# Allegro board stspin32g4_foc.brd
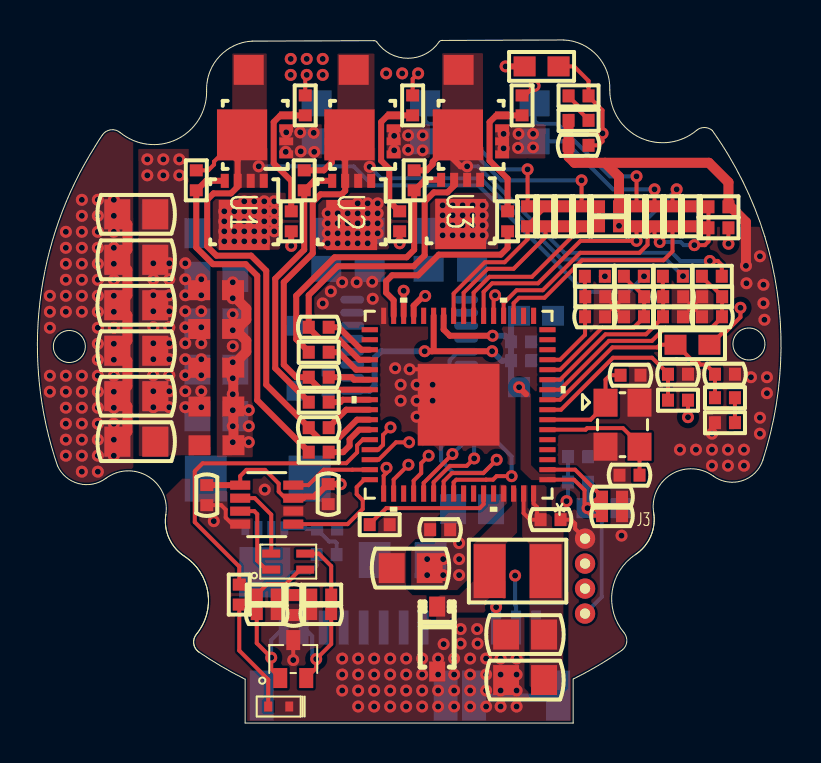
[diagram p0: board, top side]
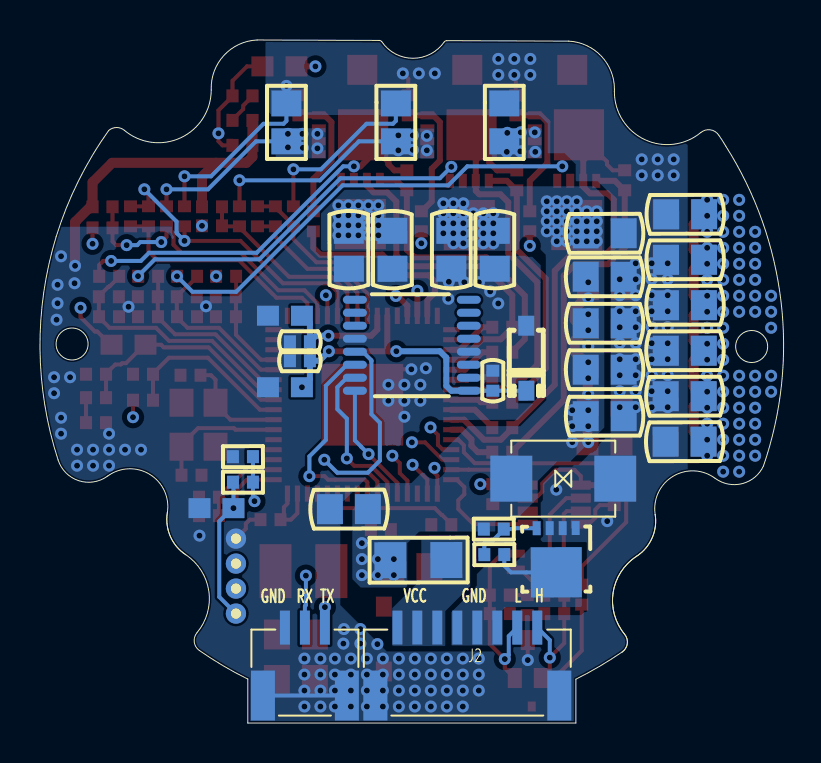
[diagram p1: board, bottom side, seen from below]

Outline 37.2 x 34.17 mm; copper layers: TOP, GND2, POWER3, BOTTOM. Coordinates in mm from the lower left corner of the outline.
Outline path: circle c1.6,18.84 r0.8 ; circle c35.6,18.96 r0.8 ; 6.43,10.43 arc(5.53,12.34) 3.43,12.24 arc(2.07,11.98) 1.01,12.86 arc(0.13,21.08) 2.9,28.87 arc(3.07,29.15) 3.25,29.42 arc(3.67,29.68) 4.14,29.55 arc(6.95,29.19) 8.47,31.59 8.46,31.71 arc(9.12,33.37) 10.75,34.11 16.85,34.14 16.85,34.14 arc(16.92,34.12) 16.98,34.08 arc(18.54,33.26) 20.11,34.09 arc(20.17,34.13) 20.24,34.15 20.24,34.15 26.33,34.17 arc(28,33.4) 28.64,31.67 arc(30.16,29.28) 32.98,29.65 arc(33.37,29.79) 33.76,29.65 arc(35.29,27.1) 36.39,24.33 arc(37.2,18.74) 36.29,13.15 arc(35.26,12.12) 33.82,12.35 arc(31.71,12.44) 30.83,10.52 ; 6.43,10.43 arc(6.58,9.25) 7.36,8.34 ; 6.43,10.43 arc(6.58,9.25) 7.36,8.34 ; 7.36,8.34 arc(8.53,6.52) 7.95,4.44 ; 7.36,8.34 arc(8.53,6.52) 7.95,4.44 ; 7.95,4.44 arc(7.82,3.97) 8.08,3.55 ; 7.95,4.44 arc(7.82,3.97) 8.08,3.55 ; 8.08,3.55 arc(9.21,2.83) 10.39,2.19 10.39,0 26.81,0 26.81,2.2 arc(28.04,2.87) 29.23,3.63 arc(29.49,4.05) 29.35,4.52 arc(28.76,6.6) 29.91,8.42 ; 29.91,8.42 arc(30.68,9.34) 30.83,10.52 ; 29.91,8.42 arc(30.68,9.34) 30.83,10.52

## Design rules (mm)
constraint set DEFAULT: pair gap 0.2

## Placement (name value [footprint] x y rotation side)
C1  100nF  [C0402]  27.9 20.32 0 top
C2  100nF  [C0402]  34.4 17.45 0 top
C3  100nF  [C0402]  27.07 28.9 180.2 top
C4  100nF  [C0402]  29.86 21.32 180 top
C5  100nF  [C0402]  31.81 21.32 0 top
C6  100nF  [C0402]  33.75 20.32 180 top
C7  100nF  [C0402]  14.07 14.77 180 top
C8  100nF  [C0402]  14.07 17.3 180 top
C11  100nF  [C0402]  14.07 19.8 180 top
C13  10u  [C0805]  8.95 22.32 180 bottom
C14  10u  [C0805]  8.95 15.35 180 bottom
C15  10u  [C0805]  8.95 20 180 bottom
C16  10u  [C0805]  8.95 17.67 180 bottom
C17  10u  [C0805]  4.95 14.07 0 top
C18  10u  [C0805]  4.95 25.45 0 top
C19  10u  [C0805]  4.95 23.17 0 top
C20  10u  [C0805]  4.95 20.9 0 top
C21  10u  [C0805]  4.95 18.62 0 top
C22  10u  [C0805]  4.95 16.35 0 top
C23  NC  [C0402]  11.47 5.47 0 top
C24  100nF  [C0402]  8.47 11.4 90 top
C25  100nF  [C0402]  14.55 11.45 90 top
C26  NC  [C0402]  12.82 5.9 90 top
C27  NC  [C0402]  14.2 5.47 0 top
C28  100nF  [C0402]  14.55 17.12 270 bottom
C29  100nF  [C0402]  20.15 9.67 0 top
C30  22uF  [C0805]  24.4 4.42 0 top
C31  22uF  [C0805]  24.4 2.15 0 top
C32  22uF  [C0805]  18.67 7.75 0 top
C33  22pf  [C0402]  29.62 12.4 0 top
C34  22pf  [C0402]  29.67 17.4 0 top
C35  100nF  [C0402]  28.75 11.3 180 top
C36  1uF  [C0603]  28.37 10.75 180 bottom
C37  100nF  [C0402]  28.75 10.37 180 top
C38  1uF  [C0603]  24.95 20.38 180 bottom
C39  100nF  [C0402]  24.2 18.12 180 bottom
C40  1uF  [C0603]  24.95 16.8 180 bottom
C41  100nF  [C0402]  24.2 19.07 180 bottom
C42  100nF  [C0402]  25.67 10.17 180 top
C43  1u  [C0603]  8.94 21.65 180.2 top
C44  1u  [C0603]  8.94 19.72 180.2 top
C45  1u  [C0603]  8.95 17.77 180.2 top
C46  1u  [C0603]  8.95 15.83 180.2 top
C47  1u  [C0603]  8.96 13.9 180.2 top
C48  10u  [C0805]  4.92 25.45 359.9 bottom
C49  10u  [C0805]  4.93 23.17 359.9 bottom
C50  10u  [C0805]  4.94 20.9 359.9 bottom
C51  10u  [C0805]  4.94 18.62 359.9 bottom
C52  10u  [C0805]  4.95 16.35 359.9 bottom
C53  10u  [C0805]  4.95 14.07 359.9 bottom
C54  10u  [C0805]  16.62 23.67 270 bottom
C55  10u  [C0805]  14.45 23.67 270 bottom
C56  10u  [C0805]  19.57 23.67 269.9 bottom
C57  10u  [C0805]  21.75 23.67 269.9 bottom
C58  10u  [C0805]  21.75 10.7 359.9 bottom
C59  10u  [C0805]  8.95 24.5 179.8 bottom
C60  100nF  [C0402]  32.05 17.45 180 top
D1  LED  [LED0402]  12.07 0.82 180 top
D7  B5819WSL  [SOD123]  20 4.2 270 top
D8  SMBJ36CA  [SOD_214]  11.02 12.22 0 bottom
D9  JLC  [SOD123]  12.87 18.25 89.8 bottom
F1  fulse  [R1206]  18.27 8.15 359.9 bottom
J1  SH_01x03  [SH1_0_3P]  23.95 3.07 180 bottom
J2  SH_01x08  [SH1_0_8P]  15.82 3.07 180 bottom
J3  hole_01x04  [4_HOLE]  27.4 7.35 0 top
J4  CON_01x01  [SMD50_50]  21.07 32.67 0 top
J5  CON_01x01  [SMD50_50]  15.82 32.67 0 top
J6  CON_01x01  [SMD50_50]  10.57 32.67 0 top
L2  10uH  [R1210]  24.02 7.6 0 top
L3  DLW21HN900SQ2L  [SMD_4P_L20-W13_BL_DLW21]  12.55 8.07 0 top
NTC1  10k  [R0603]  32.77 18.92 0 top
NTC2  10k  [R0603]  25.22 32.85 180 top
R1  24k  [R0402]  27.89 22.35 0 top
R2  2k  [R0402]  27.91 21.32 180 top
R3  2k  [R0402]  34.4 16.27 180 top
R4  2k  [R0402]  27.07 31.38 0 top
R5  24k  [R0402]  34.07 24.77 180 top
R6  24k  [R0402]  28.6 24.88 180 top
R7  2k  [R0402]  30.87 25.35 90 top
R8  2k  [R0402]  27.22 25.35 90 top
R9  24k  [R0402]  34.07 25.82 0 top
R10  24k  [R0402]  28.6 25.82 0 top
R11  2k  [R0402]  29.97 25.35 90 top
R12  2k  [R0402]  24.52 25.35 90 top
R13  24k  [R0402]  31.77 25.35 90 top
R14  24k  [R0402]  25.42 25.35 90 top
R15  24k  [R0402]  29.84 22.35 0 top
R16  24k  [R0402]  31.79 22.35 0 top
R17  24k  [R0402]  33.74 22.35 0 top
R18  2k  [R0402]  29.85 20.32 180 top
R19  2k  [R0402]  31.8 20.32 0 top
R20  2k  [R0402]  33.76 21.32 180 top
R21  10R  [R0402]  14.07 13.55 180 top
R22  10R  [R0402]  14.07 16.05 180 top
R23  10R  [R0402]  14.07 18.55 180 top
R24  24k  [R0402]  7.95 27.15 270 top
R25  24k  [R0402]  13.35 27.15 270 top
R26  24k  [R0402]  18.85 27.15 270 top
R30  10R  [R0402]  12.7 25.1 90 top
R31  10R  [R0402]  18.12 25.1 90 top
R32  10R  [R0402]  23.52 25.1 90 top
R33  24k  [R0402]  13.4 30.9 270 top
R34  24k  [R0402]  18.77 30.9 270 top
R35  24k  [R0402]  24.25 30.9 270 top
R39  50m  [R0805]  13.97 30.05 270 bottom
R40  50m  [R0805]  19.4 30.05 270 bottom
R41  50m  [R0805]  24.87 30.05 270 bottom
R42  60  [R0402]  11.47 6.4 180 top
R43  60  [R0402]  14.2 6.4 180 top
R44  2k  [R0402]  27.05 12.05 0 bottom
R46  2k  [R0402]  10.1 6.42 90 top
R48  2k  [R0402]  14.5 9.7 359.9 bottom
R49  2k  [R0402]  14.47 8.42 359.9 bottom
R50  2k  [R0402]  34.4 15.02 0.1 top
R51  2k  [R0402]  27.07 30.15 0.1 top
R52  24k  [R0402]  32.67 25.35 270 top
R53  24k  [R0402]  26.32 25.35 270 top
R54  2k  [R0402]  27.05 13.32 179.8 bottom
R55  12k  [R0402]  32.05 16.15 0 top
R56  12k  [R0402]  17.12 9.92 180 top
U1  CSD18543Q3ADNH  [DNH0008A]  10.35 25.57 270 top
U2  CSD18543Q3ADNH  [DNH0008A]  15.72 25.57 270 top
U3  CSD18543Q3ADNH  [DNH0008A]  21.17 25.62 270 top
U4  CSD18543Q3ADNH  [DNH0008A]  10.9 29.42 180 top
U5  CSD18543Q3ADNH  [DNH0008A]  16.27 29.42 180 top
U6  CSD18543Q3ADNH  [DNH0008A]  21.7 29.42 180 top
U7  TCAN3403  [SOT-23-THIN-8_DDF_TEX]  11.47 10.92 180 top
U8  ESD2CAN  [SC-70-3_L20-W13-P065-LS21-BL]  12.8 3.2 0 top
U9  MT6825  [PW0016A_L]  18.6 18.9 180 bottom
U10  STSPIN32G4  [QFN_IN32G4_STM]  21.07 15.92 180 top
U11  CSD18543Q3ADNH  [DNH0008A]  11.37 8.2 269.9 bottom
Y1  25M  [X4-3225]  29.27 14.92 270 top

## Library data of the parts
C1-C8 C11 C13-C60 = C
D1 = LED
D7 = B5819WSL
D8 D9 = SMBJ36CA
F1 = fulse
J1 = SH_01x03
J2 = SH_01x08
J3 = hole_01x04
J4-J6 = CON_01x01
L2 = L
L3 = IND_COM-IND_DLW21HN900SQ2L_0
NTC1 NTC2 = NTC
R1-R26 R30-R35 R39-R44 R46 R48-R56 = R
U1-U3 U11 = CSD18543Q3A: Tolerance: TOL; User Part Number: PN
U4-U6 = CSD18543Q3A: Tolerance: TOL
U7 = TCAN3403: User Part Number: PN; Tolerance: TOL
U8 = ESD2CAN
U9 = MT6825: Tolerance: TOL
U10 = STSPIN32G4: User Part Number: PN; Tolerance: TOL
Y1 = SMD_CRYSTAL_2

## Footprints (pads in the part's own frame, mm; a bottom-side part is the same pattern mirrored in y, then rotated)
4_HOLE
  round 1.016 hole 0.508: 1(0,-1.875) 2(0,-0.625) 3(0,0.625) 4(0,1.875)
C0402
  rect 0.6x0.65 smd: 1(-0.5,0) 2(0.5,0)
C0603
  rect 1.1x1 smd: 1(-0.85,0) 2(0.85,0)
C0805
  rect 1.3x1.5 smd: 1(-0.95,0) 2(0.95,0)
DNH0008A
  rect 0.7x0.4 smd: 1(-1.55,0.975) 2(-1.55,0.325) 3(-1.55,-0.325) 4(-1.55,-0.975) 5(1.55,-0.975) 6(1.55,-0.325) 7(1.55,0.325) 8(1.55,0.975)
  rect 2.51x2.55 smd: 9(0.66,0)
LED0402
  rect 0.4x0.5 smd: 1(-0.525,0) 2(0.525,0)
PW0016A_L
  oval 1.2x0.4 smd: 1(-2.85,2.275) 2(-2.85,1.625) 3(-2.85,0.975) 4(-2.85,0.325) 5(-2.85,-0.325) 6(-2.85,-0.975) 7(-2.85,-1.625) 8(-2.85,-2.275) 9(2.85,-2.275) 10(2.85,-1.625) 11(2.85,-0.975) 12(2.85,-0.325) 13(2.85,0.325) 14(2.85,0.975) 15(2.85,1.625) 16(2.85,2.275)
QFN_IN32G4_STM
  rect 0.813x0.254 smd: 1(-4.445,3.751) 2(-4.445,3.251) 3(-4.445,2.751) 4(-4.445,2.251) 5(-4.445,1.75) 6(-4.445,1.25) 7(-4.445,0.75) 8(-4.445,0.25) 9(-4.445,-0.25) 10(-4.445,-0.75) 11(-4.445,-1.25) 12(-4.445,-1.75) 13(-4.445,-2.251) 14(-4.445,-2.751) 15(-4.445,-3.251) 16(-4.445,-3.751) 33(4.445,-3.751) 34(4.445,-3.251) 35(4.445,-2.751) 36(4.445,-2.251) 37(4.445,-1.75) 38(4.445,-1.25) 39(4.445,-0.75) 40(4.445,-0.25) 41(4.445,0.25) 42(4.445,0.75) 43(4.445,1.25) 44(4.445,1.75) 45(4.445,2.251) 46(4.445,2.751) 47(4.445,3.251) 48(4.445,3.751)
  rect 0.254x0.813 smd: 17(-3.751,-4.445) 18(-3.251,-4.445) 19(-2.751,-4.445) 20(-2.251,-4.445) 21(-1.75,-4.445) 22(-1.25,-4.445) 23(-0.75,-4.445) 24(-0.25,-4.445) 25(0.25,-4.445) 26(0.75,-4.445) 27(1.25,-4.445) 28(1.75,-4.445) 29(2.251,-4.445) 30(2.751,-4.445) 31(3.251,-4.445) 32(3.751,-4.445) 49(3.751,4.445) 50(3.251,4.445) 51(2.751,4.445) 52(2.251,4.445) 53(1.75,4.445) 54(1.25,4.445) 55(0.75,4.445) 56(0.25,4.445) 57(-0.25,4.445) 58(-0.75,4.445) 59(-1.25,4.445) 60(-1.75,4.445) 61(-2.251,4.445) 62(-2.751,4.445) 63(-3.251,4.445) 64(-3.751,4.445)
  rect 4.089x4.089 smd: 65(0,0)
R0402
  rect 0.6x0.65 smd: 1(-0.5,0) 2(0.5,0)
R0603
  rect 1.1x1 smd: 1(-0.85,0) 2(0.85,0)
R0805
  rect 1.3x1.5 smd: 1(-0.95,0) 2(0.95,0)
R1206
  rect 1.6x1.8 smd: 1(-1.4,0) 2(1.4,0)
R1210
  rect 1.6x2.7 smd: 1(-1.4,0) 2(1.4,0)
SC-70-3_L20-W13-P065-LS21-BL
  rect 0.7x1 smd: 1(-0.65,-0.95) 2(0.65,-0.95) 3(0,0.95)
SH1_0_3P
  rect 0.5x1.7 smd: 1(-1,1.7) 2(0,1.7) 3(1,1.7)
  rect 1.2x2.5 smd: 4(-2.1,-1.7) 5(2.1,-1.7)
SH1_0_8P
  rect 0.5x1.7 smd: 1(-3.5,1.7) 2(-2.5,1.7) 3(-1.5,1.7) 4(-0.5,1.7) 5(0.5,1.7) 6(1.5,1.7) 7(2.5,1.7) 8(3.5,1.7)
  rect 1.2x2.5 smd: 9(-4.6,-1.7) 10(4.6,-1.7)
SMD50_50
  rect 1.5x1.5 smd: 1(0,0)
SMD_4P_L20-W13_BL_DLW21
  rect 0.9x0.4 smd: 1(-0.85,-0.4) 2(0.85,-0.4) 3(0.85,0.4) 4(-0.85,0.4)
SOD123
  rect 1x0.8 smd: 1(1.625,0) 2(-1.625,0)
SOD_214
  rect 2.1x2.3 smd: 1(-2.6,0) 2(2.6,0)
SOT-23-THIN-8_DDF_TEX
  rect 1.003x0.457 smd: 1(-1.327,0.975) 2(-1.327,0.325) 3(-1.327,-0.325) 4(-1.327,-0.975) 5(1.327,-0.975) 6(1.327,-0.325) 7(1.327,0.325) 8(1.327,0.975)
X4-3225
  rect 1.4x1.2 smd: 1(-1.1,-0.85) 2(1.1,-0.85) 3(1.1,0.85) 4(-1.1,0.85)

## Nets
VBAT: C24.2 C25.2 C28.2 C35.2 C36.2 C37.2 C38.2 C39.2 C40.2 C41.2 D9.2 J3.1 R5.1 R6.1 R44.2 R55.2 U7.3 U7.5(VIO) U9.9 U10.1 U10.2 U10.26 U10.27
VBUS_PA0: C1.1 R1.1 R2.2 U10.13
BOOT1: C7.1 U10.41
BOOT2: C8.1 U10.38
BOOT3: C11.1 U10.35
CAN_H: L3.1 U7.7
CAN_L: L3.4 U7.6
CAN_RX: U7.4 U10.47
CAN_TX: U7.1 U10.48
CANH: C23.1 J2.8 L3.2 R42.2 U8.1
CANL: C27.2 J2.7 L3.3 R43.1 U8.2(IO2)
CLK: J3.3 U10.50
DAC1_PA4: U10.17
DAC2_PA5: U10.18
DIO: J3.2 U10.49
GHS1: R21.1 U10.43
GHS2: R22.1 U10.40
GHS3: R23.1 U10.37
GLS1: R30.1 U10.29
GLS2: R31.1 U10.30
GLS3: R32.1 U10.31
HO1: R21.2 R24.2 U1.4
HO2: R22.2 R25.2 U2.4
HO3: R23.2 R26.2 U3.4
I2C_SCL_PB8: R56.2 U10.59
I2C_SDA_B_PB7: U10.58
LO1: R30.2 R33.2 U4.4
LO2: R31.2 R34.2 U5.4
LO3: R32.2 R35.2 U6.4
NRST_PG10: C60.2 R55.1 U10.8
OPN1_PA3: U10.16
OPN2_PC5: R11.1 R13.2 R52.1 U10.22
OPN3_PB2: R12.1 R14.2 R53.1 U10.25
OPO1_PA2: U10.15
OPO2_PA6: R13.1 R52.2 U10.19
OPO3_PB1: R14.1 R53.2 U10.24
OPP1_PA1: U10.14
OPP2_PA7: R5.2 R7.1 R9.1 U10.20
OPP3_PB0: R6.2 R8.1 R10.1 U10.23
OSCIN_PF0: C33.2 U10.6 Y1.3
OSCOUT_PF1: C34.1 U10.7 Y1.1
OUT1: C7.2 J6.1 R15.2 R24.1 U1.1 U1.2 U1.3(S_3) U4.5 U4.6 U4.7 U4.8 U4.9 U10.42
OUT2: C8.2 J5.1 R16.2 R25.1 U2.1 U2.2 U2.3(S_3) U5.5 U5.6 U5.7 U5.8 U5.9 U10.39
OUT3: C11.2 J4.1 R17.2 R26.1 U3.1 U3.2 U3.3(S_3) U6.5 U6.6 U6.7 U6.8 U6.9 U10.36
PA8: R46.2 U10.44
PA15: U10.51
PB6: U10.57
PB9: U10.60
PC0: C2.1 NTC1.1 R3.2 U10.9
PC4: C3.1 NTC2.1 R4.2 U10.21
PC13: U10.3
PC14: U10.4
PC15: U10.5
REGIN: C30.2 C31.2 C42.2 L2.2 U10.63 U10.64
SCREF: R44.1 R54.2 U10.52
SNA: C1.2 C2.2 C3.2 C4.2 C5.2 C6.2 C13.2 C14.2 C15.2 C16.2 C17.2 C18.2 C19.2 C20.2 C21.2 C22.2 C23.2 C24.1 C25.1 C26.1 C27.1 C28.1 C29.1 C30.1 C31.1 C32.1 C33.1 C34.2 C35.1 C36.1 C37.1 C38.1 C39.1 C40.1 C41.1 C42.1 C43.2 C44.2 C45.2 C46.2 C47.2 C48.2 C49.2 C50.2 C51.2 C52.2 C53.2 C54.2 C55.2 C56.2 C57.2 C58.2 C59.2 C60.1 D1.1(CATHODE) D7.1 D8.1 D9.1 J1.1 J1.4 J1.5 J2.9 J2.10 J3.4 R2.1 R9.2 R10.2 R11.2 R12.2 R18.2 R19.2 R20.2 R33.1 R34.1 R35.1 R39.1 R40.1 R41.1 R50.1 R51.1 R54.1 R56.1 U7.2 U7.8 U8.3 U9.4 U9.12 U10.32 U10.65(VSS) U11.1 U11.2 U11.3(S_3) Y1.2 Y1.4(GND1)
SPA: R39.2 U4.1 U4.2 U4.3(S_3)
SPB: R8.2 R40.2 U5.1 U5.2 U5.3(S_3)
SPC: R7.2 R41.2 U6.1 U6.2 U6.3(S_3)
SPI_CS_PD2: U9.8 U10.53
SPI_MISO_PB4: U9.5 U10.55
SPI_MOSI_PB5: U9.6 U10.56
SPI_SCK_PB3: U9.7 U10.54
SW: D7.2 L2.1 U10.62
UART_RX: J1.2 U10.46
UART_TX: J1.3 U10.45
USER2_PB10: U10.28
VM: C13.1 C14.1 C15.1 C16.1 C17.1 C18.1 C19.1 C20.1 C21.1 C22.1 C29.2 C32.2 C43.1 C44.1 C45.1 C46.1 C47.1 C48.1 C49.1 C50.1 C51.1 C52.1 C53.1 C54.1 C55.1 C56.1 C57.1 C58.1 C59.1 D8.2 F1.2 NTC1.2 NTC2.2 R1.2 R48.2 U1.5 U1.6 U1.7 U1.8 U1.9 U2.5 U2.6 U2.7 U2.8 U2.9 U3.5 U3.6 U3.7 U3.8 U3.9 U10.61
VOUT1_PC3: C4.1 R15.1 R18.1 U10.12
VOUT2_PC2: C5.1 R16.1 R19.1 U10.11
VOUT3_PC1: C6.1 R17.1 R20.1 U10.10
N16827842: R3.1 R50.2
N16829717: C26.2 R42.1 R43.2
N16845655: D1.2 R46.1
N16851538: J2.4 J2.5 J2.6 R49.1 U11.5 U11.6 U11.7 U11.8 U11.9
N16851557: F1.1 J2.1 J2.2 J2.3
N16854564: R48.1 R49.2 U11.4
N16863103: R4.1 R51.2

Pads without a net: U9 1 2 3 10 11 13 14 15 16; U10 33 34

## Via types
v1: diameter 0.6, hole 0.3, TOP to BOTTOM, 373 vias

## Routing (per net, layer and track width the routed paths; a pad name or vN(x,y) marks a point on that pad's centre or on a via; arc(x,y) is an arc through that point)
VBAT: length 86.3
  TOP w0.2: v1(34.58,23.97) R5.1 ; U10.2 26.9,12.67 28.25,11.32 C35.2 ; C35.2 28.08,11.3 v1(27.53,10.75) 27.88,10.75 C37.2 ; C35.2 C37.2 ; C37.2 27.72,10.37 27.38,10.72 27.38,11.65 26.85,12.17 U10.1 ; U7.3 12.4,11.25 12.07,11.58 12.07,11.98 11.39,12.66 10.46,12.66 10.15,12.36 U7.5 ; v1(32.55,15.3) R55.2
  TOP w0.3: v1(15.18,11.95) C25.2 14.53,11.95 14.03,11.45 13.97,11.45 13.84,11.33 13.37,11.33 13.3,11.25 U7.3 ; U10.27 19.82,18.67 19.75,18.6 ; v1(22.78,19.38) 20.64,19.38 20.33,19.69 U10.26 ; C24.2 U7.5 ; 19.75,18.6 v1(22.75,18.6) ; 19.75,18.6 v1(19.38,18.6) ; v1(24.1,16.8) 24.45,16.45
  POWER3 w0.2: v1(34.58,23.97) 33.68,24.88 v1(29.1,24.88) 28.28,24.88 v1(22.78,19.38) ; J3.1 28.14,6.21 28.14,7.38 30.3,9.55 30.3,12 31.3,13 31.3,14.05 v1(32.55,15.3)
  POWER3 w0.3: v1(15.17,11.95) 15.17,16 17.77,18.6 v1(19.37,18.6)
  BOTTOM w0.2: 12.87,16.62 C28.2 15.75,16.62 ; R44.2 27.53,12.02 v1(27.53,10.75) 27.58,10.75 28.24,10.09 28.24,6.31 J3.1
  BOTTOM w0.3: v1(22.75,18.6) 23.23,18.12 23.7,18.12 ; v1(24.1,16.8) 23.7,17.2 23.7,18.12 ; C41.2 23.4,19.38 v1(22.78,19.38) ; C41.2 23.7,19.97 C38.2 ; C41.2 23.7,18.12 ; v1(19.38,18.6) 17.2,18.6 16.88,18.28 16.88,16.87 16.63,16.62 15.75,16.62
VBUS_PA0: length 5.3
  TOP w0.2: R1.1 27.39,21.34 R2.2 27.4,21.32 C1.1 27.4,19.42 26.15,18.18 U10.13
BOOT1: length 2.4
  TOP w0.3: C7.1 14.58,14.8 15.45,15.67 U10.41
BOOT2: length 2.1
  TOP w0.3: C8.1 15.72,17.3 15.84,17.18 U10.38
BOOT3: length 2.5
  TOP w0.3: C11.1 15.08,19.8 16.21,18.68 U10.35
CAN_H: length 4.1
  TOP w0.2: L3.1 11.45,7.67 11,8.12 11,10.45 10.85,10.6 U7.7
CAN_L: length 3.8
  TOP w0.2: L3.4 11.7,10.43 10.88,11.25 U7.6
CAN_RX: length 4.1
  TOP w0.2: U7.4 13.55,11.9 14.33,12.67 15.76,12.67 15.76,12.67 U10.47
CAN_TX: length 5.8
  TOP w0.2: U10.48 16.35,12.17 15.98,11.8 15.98,11.45 16.28,11.14 16.28,10.71 15.52,9.95 U7.1
CANH: length 9.4
  TOP w0.2: L3.2 13.15,7.67 12.43,6.95 11.5,6.95 10.97,6.42 R42.2 C23.1 10.97,4 v1(11.7,3.27) 11.7,2.7 U8.1
  BOTTOM w0.2: v1(11.7,3.27) 11.7,4.15 J2.8
CANL: length 9.5
  TOP w0.2: U8.2 13.95,2.75 v1(13.95,3.2) 14.7,3.95 C27.2 R43.1 14.7,7.85 14.08,8.47 L3.3
  BOTTOM w0.2: v1(13.95,3.2) 13.75,3.4 13.75,4.35 J2.7
CLK: length 12.6
  TOP w0.2: U10.50 17.82,12.18 v1(18.56,12.92)
  POWER3 w0.2: J3.3 24.05,11.32 20.69,11.32 19.09,12.92 v1(18.56,12.92)
DIO: length 13.8
  TOP w0.2: U10.49 17.32,12.37 17.47,12.52 v1(17.47,12.77)
  POWER3 w0.2: v1(17.47,12.77) 17.84,12.39 19.08,12.39 20.55,10.92 23.2,10.92 J3.2
GHS1: length 2.7
  TOP w0.3: U10.43 16.1,14.67 15.62,14.19 15.62,13.87 15.3,13.55 R21.1
GHS2: length 2.1
  TOP w0.3: U10.40 15.28,16.18 15.15,16.05 R22.1
GHS3: length 2.4
  TOP w0.3: U10.37 15.95,17.68 15.07,18.55 R23.1
GLS1: length 11.2
  TOP w0.3: v1(19.4,21.37) 19.31,21.37 18.82,20.88 U10.29 ; v1(12.7,23.87) R30.1
  POWER3 w0.3: v1(12.7,23.87) 13.47,23.1 17,23.1 17.42,22.68 17.42,21.1 17.73,20.79 18.83,20.79 v1(19.4,21.37)
GLS2: length 4.3
  TOP w0.3: v1(18.13,24) R31.1 ; U10.30 v1(18.32,21.63)
  POWER3 w0.3: v1(18.12,24) 18.12,23.42 18.32,23.22 v1(18.32,21.63)
GLS3: length 9.5
  TOP w0.3: R32.1 23.52,23.77 23.18,23.43 20.08,23.43 19.05,22.4 17.75,22.4 17.45,22.1 17.45,21.53 17.82,21.15 U10.31
HO1: length 18
  TOP w0.3: R21.2 13.57,13.57 11,16.15 11,22.37 10.42,22.96 8.78,22.96 7.95,23.79 R24.2 7.97,26.65 8.44,27.12 U1.4
HO2: length 13.5
  TOP w0.3: R22.2 13.58,16.07 11.9,17.75 11.9,22.23 13.35,23.68 R25.2 13.37,26.65 13.84,27.12 U2.4
HO3: length 14.5
  TOP w0.3: U3.4 19.4,27.17 18.88,26.65 R26.2 18.85,23.68 18.47,23.3 14.87,23.3 12.95,21.38 12.95,19.2 13.58,18.57 R23.2
I2C_SCL_PB8: length 6.7
  TOP w0.2: U10.59 22.33,10.95 22.13,10.75 17.45,10.75 17.11,10.41 17.09,10.41 16.63,9.95 R56.2
LO1: length 6.5
  TOP w0.3: R33.2 U4.4 12.16,30.4 11.82,30.06 11.82,28 12.7,27.12 R30.2
LO2: length 6.6
  TOP w0.3: 18.13,25.6 18.1,25.6 17.6,26.1 17.6,27.73 17.2,28.14 17.2,30.06 17.53,30.4 U5.4 R34.2
LO3: length 6.6
  TOP w0.3: R32.2 23.52,27.23 22.62,28.14 22.62,30.06 22.96,30.4 U6.4 R35.2
NRST_PG10: length 8.8
  TOP w0.2: U10.8 26.2,15.67 28.8,18.27 30.75,18.27 31.55,17.47 C60.2 R55.1
OPN2_PC5: length 15.9
  TOP w0.2: R52.1 R13.2 31.78,26.4 31.85,26.47 31.85,26.57 v1(31.98,26.7) ; U10.22 22.33,21.57 22.75,22 25.05,22 27.17,24.12 v1(29.98,24.12) R11.1
  BOTTOM w0.2: v1(31.98,26.7) 30.37,25.09 30.37,24.55 30.35,24.52 30.35,24.5 v1(29.97,24.12)
OPN3_PB2: length 8.9
  TOP w0.2: U10.25 20.83,21.49 22.39,23.05 23.38,23.05 24.53,24.2 R12.1 24.53,24.9 25.43,25.8 R14.2 R53.1
OPO2_PA6: length 11.8
  TOP w0.2: R52.2 R13.1 31.77,23.6 31.32,23.15 27.24,23.15 25.37,21.27 24.1,21.27 23.82,21 U10.19
OPO3_PB1: length 7.8
  TOP w0.2: U10.24 21.33,21.52 22.53,22.72 23.83,22.72 25.43,24.32 R14.1 R53.2
OPP2_PA7: length 15.3
  TOP w0.2: U10.20 23.32,21 23.97,21.65 25.28,21.65 27.16,23.52 30.12,23.52 30.53,23.93 30.53,24.5 R7.1 30.87,24.32 v1(31.14,24.06) ; R9.1 R5.2 33.57,24.09 33.39,23.91 v1(32.87,23.91)
  BOTTOM w0.2: v1(31.14,24.06) 32.19,24.06 32.34,23.91 v1(32.87,23.91)
OPP3_PB0: length 9.8
  TOP w0.2: R10.1 R6.2 28.08,24.85 R8.1 27.23,24.8 24.75,22.32 22.62,22.32 21.83,21.53 U10.23
OSCIN_PF0: length 6.5
  TOP w0.2: U10.6 27.42,14.67 27.5,14.75 29.3,14.75 30.12,13.92 Y1.3 C33.2
OSCOUT_PF1: length 5.3
  TOP w0.2: C34.1 28.65,17.4 28.43,17.18 28.43,15.92 27.68,15.17 U10.7
OUT1: length 46.2
  TOP w0.2: R24.1 8.55,27.65 8.84,27.94 8.84,28.09 9.2,28.45 U4.8
  TOP w0.3: U4.8 9.73,28.45 10.03,28.15 U1.3 10.03,26.83 9.69,26.5 8.82,26.5 8.5,26.18 8.5,23.85 8.96,23.38 10.69,23.38 11.45,22.62 11.45,16.92 13.58,14.8 C7.2 13.58,14.75 14.15,14.17 14.99,14.17 15.99,15.17 U10.42
  BOTTOM w0.2: v1(30.35,22.35) 29.57,21.57 27.39,21.57 22.06,26.9 16.77,26.9 15.82,27.85 v1(11.07,27.85)
OUT2: length 37.5
  TOP w0.2: v1(32.3,22.36) R16.2
  TOP w0.3: 15.4,27.74 U2.3 15.4,26.62 15.23,26.45 14.17,26.45 13.78,26.06 13.78,23.5 12.33,22.05 12.33,17.93 12.95,17.3 C8.2 13.58,17.27 14.18,16.68 U10.39 ; R25.1 14.33,27.65 14.73,28.04 U5.8 15.1,28.45 15.4,28.15 15.4,27.87
  BOTTOM w0.2: v1(16.63,27.82) 17.2,27.25 22.17,27.25 26.23,23.2 31.46,23.2 v1(32.3,22.36)
OUT3: length 35.4
  TOP w0.2: v1(33.64,23.12) 34.04,23.12 34.24,22.92 R17.2
  TOP w0.3: U10.36 16.1,18.18 15.08,19.2 14.15,19.2 13.58,19.77 C11.2 13.58,21.4 15.03,22.85 18.83,22.85 19.38,23.4 19.38,26.09 19.84,26.55 20.52,26.55 20.85,26.88 U3.3 ; R26.1 19.48,27.65 19.78,27.95 19.78,28.07 U6.8 20.58,28.45 21.18,27.85 v1(21.5,27.85)
  BOTTOM w0.2: v1(21.5,27.85) 22.04,27.85 26.36,23.52 31.75,23.52 32.16,23.12 v1(33.64,23.12)
PA8: length 16.2
  TOP w0.2: R46.2 10.1,7.82 7.87,10.05 7.87,12.6 8.27,12.99 14.18,12.99 14.19,13 15.45,13 16,13.54 16,13.9 16.27,14.17 U10.44
PC0: length 11.3
  TOP w0.2: R3.2 C2.1 33.9,17.47 33.44,17.94 33.16,17.94 33.1,18 32.9,18 31.98,18.92 31.15,18.92 31.02,18.79 28.77,18.79 26.15,16.18 U10.9
PC4: length 17.3
  TOP w0.2: U10.21 22.83,20.37 22.83,21.32 v1(22.9,21.4) ; NTC2.1 26.85,32.85 27.58,32.13 R4.2 27.58,31.35 28.28,30.65 v1(28.28,29.5) 28.28,29.1 28.08,28.9 27.58,28.9
  POWER3 w0.2: v1(22.9,21.4) 28.28,26.77 v1(28.28,29.5)
REGIN: length 3.4
  TOP w0.2: U10.64 24.82,10.97 25,10.8 25,10.35 C42.2 24.65,10.17 24.32,10.5 U10.63
SCREF: length 12.3
  TOP w0.2: v1(19.57,13.37) 19.2,13 19.2,12.5 18.82,12.12 U10.52
  POWER3 w0.2: v1(19.58,13.37) 21.28,11.67 25.9,11.67 v1(26.47,11.1)
  BOTTOM w0.2: v1(26.47,11.1) 26.55,11.18 R44.1 R54.2
SNA: length 50.9
  TOP w0.2: v1(13.48,32.42) 13.4,32.35 R33.1 ; 18.78,31.4 18.78,32.22 v1(19.05,32.5) ; C42.1 26.7,10.17 26.91,9.97 26.91,9.72 J3.4 ; v1(29.98,27.35) R11.2 ; v1(24.53,27.7) R12.2 ; C24.1 9.2,10.9 9.42,10.68 9.42,10.28 9.75,9.95 U7.8 ; v1(24.88,31.88) 24.4,31.4 R35.1 ; U10.65 20.85,15.92 20.3,16.47 20.3,17.14 19.99,17.45 19.32,17.45 19.08,17.7 18.6,17.7 18.6,17.7 v1(18.63,17.7) ; v1(12.8,3.15) U8.3
  TOP w0.5: 28.4,28.03 29.1,27.33 R10.2 ; 28.4,28.03 33.6,28.03 34.58,27.05 R9.2 34.68,25.82 35.45,25.06 v1(35.45,22.88) ; 28.4,28.03 26.87,28.03 26.58,28.32 C3.2 R51.1
  BOTTOM w0.2: J1.5 J1.4 ; R40.1 19.4,30.12 19.55,29.98 20.87,29.98 23.15,27.7 v1(24.53,27.7) ; R41.1 24.88,30.12 25.02,29.98 26.02,29.98 28.65,27.35 v1(29.98,27.35)
  vias: v1(5.5,28.2) v1(5.5,27.4) v1(5.8,23) v1(5.8,22.2) v1(5.8,21.4) v1(5.8,20.6) v1(5.8,19.8) v1(5.8,19) v1(5.8,18.2) v1(5.8,17.4) v1(5.8,16.6) v1(5.8,15.8) v1(6.3,28.2) v1(6.3,27.4) v1(6.6,23) v1(6.6,22.2) v1(6.6,21.4) v1(6.6,20.6) v1(6.6,19.8) v1(6.6,19) v1(6.6,18.2) v1(6.6,17.4) v1(6.6,16.6) v1(6.6,15.8) v1(7.1,28.2) v1(7.1,27.4) v1(7.4,23) v1(7.4,22.2) v1(7.4,21.4) v1(7.4,20.6) v1(7.4,19.8) v1(7.4,19) v1(7.4,18.2) v1(7.4,17.4) v1(7.4,16.6) v1(7.4,15.8) v1(8.2,22.2) v1(8.2,21.4) v1(8.2,20.6) v1(8.2,19.8) v1(8.2,19) v1(8.2,18.2) v1(8.2,17.4) v1(8.2,16.6) v1(8.2,15.8) v1(8.82,10.1) v1(11.37,11.67) v1(12.67,33.22) v1(12.67,32.42) v1(13.47,33.22) v1(14.27,33.22) v1(14.27,32.42) v1(14.28,20.99) v1(14.68,21.59) v1(15.25,22.05) v1(15.25,3.22) v1(15.25,2.42) v1(15.25,1.62) v1(15.97,22.05) v1(16.05,3.22) v1(16.05,2.42) v1(16.05,1.62) v1(16.05,0.82) v1(16.75,22.07) v1(16.78,21.22) v1(16.85,3.22) v1(16.85,2.42) v1(16.85,1.62) v1(16.85,0.82) v1(17.45,32.5) v1(17.65,3.22) v1(17.65,2.42) v1(17.65,1.62) v1(17.65,0.82) v1(17.9,17.75) v1(18.17,16.92) v1(18.17,16.12) v1(18.25,32.5) v1(18.45,3.22) v1(18.45,2.42) v1(18.45,1.62) v1(18.45,0.82) v1(18.97,16.92) v1(18.97,16.12) v1(18.97,15.32) v1(19.25,3.22) v1(19.25,2.42) v1(19.25,1.62) v1(19.25,0.82) v1(19.77,16.92) v1(19.77,16.12) v1(20.05,3.22) v1(20.05,2.42) v1(20.05,1.62) v1(20.05,0.82) v1(20.32,3.95) v1(20.85,3.22) v1(20.85,2.42) v1(20.85,1.62) v1(20.85,0.82) v1(21.17,4.7) v1(21.17,3.97) v1(21.65,3.22) v1(21.65,2.42) v1(21.65,1.62) v1(21.65,0.82) v1(22,4.7) v1(22.02,3.97) v1(22.45,3.22) v1(22.45,2.42) v1(22.45,1.62) v1(22.45,0.82) v1(23.17,3.22) v1(23.17,2.42) v1(23.17,1.62) v1(23.17,0.82) v1(23.97,3.22) v1(23.97,2.42) v1(23.97,1.62) v1(23.97,0.82) v1(28.9,20.85) v1(29.22,9.37) v1(32.15,13.67) v1(32.77,20.82) v1(32.95,13.67) v1(33.75,14.47) v1(33.75,13.67) v1(33.75,12.87) v1(34.55,13.67) v1(34.55,12.87) v1(35.35,13.67) v1(35.35,12.87) v1(35.47,22) v1(35.7,17.3) v1(36.15,23.35) v1(36.15,15.27) v1(36.15,14.47) v1(36.32,21.92) v1(36.32,21) v1(36.37,20.17) v1(36.5,17.3) v1(36.5,16.5)
SPA:
  vias: v1(12.45,29.55) v1(12.42,28.57) v1(13.15,29.55) v1(13.17,28.6) v1(13.82,29.52) v1(13.85,28.57)
SPB: length 9.9
  TOP w0.2: v1(27.22,27.15) R8.2
  BOTTOM w0.2: v1(27.23,27.15) 23.2,27.15 21.25,29.1 R40.2
  vias: v1(17.85,29.38) v1(17.85,28.65) v1(18.55,29.4) v1(18.55,28.67) v1(19.27,29.4) v1(19.27,28.65)
SPC: length 7.8
  TOP w0.2: v1(30.87,26.7) R7.2
  BOTTOM w0.2: R41.2 26.4,29.1 28.8,26.7 v1(30.88,26.7)
  vias: v1(23.32,29.47) v1(23.32,28.75) v1(24.07,29.47) v1(24.05,28.77) v1(24.8,29.47) v1(24.8,28.8)
SPI_CS_PD2: length 6
  TOP w0.2: U10.53 19.32,12.01 v1(20.77,13.45)
  BOTTOM w0.2: v1(20.76,13.45) 21.14,13.83 21.14,13.83 21.45,14.14 U9.8
SPI_MISO_PB4: length 13.2
  TOP w0.2: U10.55 20.32,12.09 20.74,12.5 22.31,12.5 v1(22.98,13.17)
  BOTTOM w0.2: v1(22.98,13.17) 22.33,12.52 20.8,12.52 20.2,13.13 20.2,15.02 20.62,15.45 20.62,18.1 20.63,18.1 20.63,18.15 21.05,18.57 21.45,18.57
SPI_MOSI_PB5: length 10.3
  TOP w0.2: U10.56 20.82,12.04 20.95,12.17 22.44,12.17 22.44,12.17 22.8,12.17 22.97,12.35 v1(23.72,12.35)
  BOTTOM w0.2: U9.6 21.85,17.92 22.9,16.87 22.9,14.16 23.72,13.34 v1(23.72,12.35)
SPI_SCK_PB3: length 7.9
  TOP w0.2: v1(21.85,13.24) 21.48,12.87 20.64,12.87 19.82,12.05 U10.54
  BOTTOM w0.2: 21.45,17.27 21.85,17.27 22.32,16.8 22.32,15.7 21.85,15.23 v1(21.85,13.24)
UART_RX: length 17.6
  TOP w0.2: U10.46 17.07,13.17 17.94,14.04 v1(18.6,14.04)
  POWER3 w0.2: v1(18.6,14.04) 18,14.04 16.94,12.99 16.94,12.55 17.42,12.07 18.91,12.07 20.4,10.57 22.4,10.57 23.9,9.07 v1(23.9,7.37)
  BOTTOM w0.2: J1.2 23.95,5.85 23.9,5.9 v1(23.9,7.37)
UART_TX: length 17.1
  TOP w0.2: v1(17.67,14.79) 17.29,14.42 17.29,13.91 17.05,13.67 U10.45
  POWER3 w0.2: v1(17.67,14.79) 17.67,14.26 16.61,13.21 16.61,12.11 17,11.72 18.75,11.72 20.3,10.17 22.33,10.17 22.95,9.55 v1(22.95,5.8)
  BOTTOM w0.2: v1(22.95,5.8) J1.3
VM: length 84.6
  TOP w0.2: v1(35.17,20.77) 35.17,20.3 34.46,19.59 34.33,19.59 33.67,18.92 NTC1.2
  TOP w0.3: NTC2.2 v1(23.42,32.85)
  TOP w0.5: v1(3.83,14.97) 3.83,14.25 C17.1 ; C17.1 3.93,14.07 v1(3.83,14.17) ; C17.1 4.5,14.58 4.5,15.85 C22.1 4.5,16.85 4.5,18.12 C21.1 4.5,19.13 4.5,20.4 C20.1 4.5,21.4 4.5,22.67 C19.1 4.5,23.68 4.5,24.95 C18.1 ; C43.1 9.79,21.39 10.45,20.73 10.45,20.17 10,19.72 C44.1 9.99,19.53 10.06,19.53 10.45,19.13 10.45,18.57 9.8,17.91 9.8,17.78 C45.1 9.8,15.84 C46.1 9.81,14.88 v1(9.78,14.85) 9.81,14.81 C47.1
  POWER3 w0.2: v1(9.78,20.45) 10.8,19.42 12.97,19.42 12.97,19.42 21.05,19.42 22.7,17.77 23.82,17.77 v1(28.39,22.35) 28.95,22.35 29.53,21.77 34.18,21.77 v1(35.18,20.77)
  POWER3 w0.3: v1(23.42,32.85) 23.42,32.22 25.92,29.72 25.92,25.42 20.3,19.8 13.13,19.8 10.33,22.6 v1(9.77,22.05)
  vias: v1(0.62,21.38) v1(0.62,20.57) v1(0.62,19.77) v1(0.62,17.38) v1(0.62,16.57) v1(1.42,24.57) v1(1.42,23.77) v1(1.42,22.97) v1(1.42,22.17) v1(1.42,21.38) v1(1.42,20.57) v1(1.42,17.38) v1(1.42,16.57) v1(1.42,15.77) v1(1.42,14.97) v1(1.42,14.17) v1(1.42,13.37) v1(2.22,26.17) v1(2.22,25.38) v1(2.22,24.57) v1(2.22,23.77) v1(2.22,22.97) v1(2.22,22.17) v1(2.22,21.38) v1(2.22,20.57) v1(2.22,17.38) v1(2.22,16.57) v1(2.22,15.77) v1(2.22,14.97) v1(2.22,14.17) v1(2.22,13.37) v1(2.22,12.57) v1(3.02,26.17) v1(3.02,25.38) v1(3.02,24.57) v1(3.02,23.77) v1(3.02,22.97) v1(3.02,22.17) v1(3.02,21.38) v1(3.02,20.57) v1(3.02,19.77) v1(3.02,18.97) v1(3.02,18.17) v1(3.02,17.38) v1(3.02,16.57) v1(3.02,15.77) v1(3.02,14.97) v1(3.02,14.17) v1(3.02,13.37) v1(3.02,12.57) v1(3.82,26.17) v1(3.82,25.38) v1(3.82,24.57) v1(3.82,23.77) v1(3.82,22.97) v1(3.82,22.17) v1(3.82,21.38) v1(3.82,20.57) v1(3.82,19.77) v1(3.82,18.97) v1(3.82,18.17) v1(3.82,17.38) v1(3.82,16.57) v1(3.82,15.77) v1(3.82,13.37) v1(9.35,25.6) v1(9.35,25.1) v1(9.35,24.6) v1(9.35,24.1) v1(9.85,25.6) v1(9.85,25.1) v1(9.85,24.6) v1(9.85,24.1) v1(9.77,21.25) v1(9.77,19.65) v1(9.77,18.85) v1(9.77,18.05) v1(9.77,17.25) v1(9.77,16.45) v1(9.77,15.65) v1(9.77,14.05) v1(10.35,26.1) v1(10.35,25.6) v1(10.35,25.1) v1(10.35,24.6) v1(10.35,24.1) v1(10.57,15.65) v1(10.57,14.85) v1(10.57,14.05) v1(10.85,26.1) v1(10.85,25.6) v1(10.85,25.1) v1(10.85,24.6) v1(10.85,24.1) v1(11.35,26.1) v1(11.35,25.6) v1(11.35,25.1) v1(11.35,24.6) v1(11.35,24.1) v1(11.85,26.1) v1(11.85,25.6) v1(11.85,25.1) v1(11.85,24.6) v1(14.52,25.5) v1(14.52,25) v1(14.52,24.5) v1(14.52,24) v1(15.02,25.5) v1(15.02,25) v1(15.02,24.5) v1(15.02,24) v1(15.52,25.5) v1(15.52,25) v1(15.52,24.5) v1(15.52,24) v1(16.02,26) v1(16.02,25.5) v1(16.02,25) v1(16.02,24.5) v1(16.02,24) v1(16.52,26) v1(16.52,25.5) v1(16.52,25) v1(16.52,24.5) v1(16.52,24) v1(17.02,26) v1(17.02,25.5) v1(17.02,25) v1(17.02,24.5) v1(19.5,8.2) v1(19.5,7.4) v1(20.27,25.9) v1(20.27,25.4) v1(20.27,24.9) v1(20.27,24.4) v1(20.3,8.2) v1(20.3,7.4) v1(20.77,25.9) v1(20.77,25.4) v1(20.77,24.9) v1(20.77,24.4) v1(21.1,9) v1(21.1,8.2) v1(21.1,7.4) v1(21.27,25.9) v1(21.27,25.4) v1(21.27,24.9) v1(21.27,24.4) v1(21.77,25.9) v1(21.77,25.4) v1(21.77,24.9) v1(21.77,24.4) v1(22.27,25.9) v1(22.27,25.4) v1(22.27,24.9) v1(22.27,24.4)
VOUT1_PC3: length 8.4
  TOP w0.2: U10.12 26.15,17.68 28.25,19.77 29.82,19.77 30.35,20.3 R18.1 30.36,20.33 C4.1 30.36,21.35 29.9,21.81 29.87,21.81 29.82,21.86 29.8,21.86 29.34,22.32 R15.1
VOUT2_PC2: length 9.1
  TOP w0.2: R16.1 31.29,21.34 C5.1 31.31,20.33 R19.1 31.3,20.3 30.44,19.45 28.42,19.45 26.15,17.18 U10.11
VOUT3_PC1: length 12.7
  TOP w0.2: R17.1 33.24,22.32 33.7,21.86 33.72,21.86 33.77,21.81 33.8,21.81 34.26,21.35 R20.1 34.26,20.33 C6.1 34.25,20.3 33.72,19.77 31.4,19.77 30.75,19.12 28.6,19.12 26.15,16.68 U10.10
N16827842: length 1.2
  TOP w0.2: R3.1 R50.2
N16829717: length 1.7
  TOP w0.2: R42.1 C26.2 R43.2
N16845655: length 5.7
  TOP w0.2: D1.2 11.55,2.17 10.1,3.62 R46.1
N16851538: length 3.3
  BOTTOM w0.2: R49.1 13.97,7.87 13.64,7.54 12.88,7.54 U11.9
N16854564: length 3.5
  BOTTOM w0.2: 14.98,8.42 14.98,9 14.9,9.07 14.6,9.07 14,9.68 R48.1 13.47,9.7 13.43,9.75 U11.4
N16863103: length 1.6
  TOP w0.2: R4.1 26.57,31.35 27.03,30.89 27.03,30.71 27.57,30.18 27.57,30.15

## Copper pours and planes (outline as drawn; the poured copper is in the pictures)
VBAT on TOP: 25.92,12.47 25.12,12.47 24.7,12.9 24.7,16.45 24.52,16.62 24.27,16.62 24.17,16.52 24.17,12.67 24.82,12.05 25.92,12.05
OUT1 on TOP: 9.75,33.5 9.75,28.92 11.47,28.92 11.47,33.5
OUT1 on TOP: 11.52,26.78 11.52,28.78 9.82,28.78 9.82,26.78
OUT2 on TOP: 15.01,33.49 15.01,28.9 16.86,28.9 16.86,33.49
OUT2 on TOP: 16.9,26.79 16.9,28.79 15.2,28.79 15.2,26.79
OUT3 on TOP: 22.35,26.83 22.35,28.83 20.65,28.83 20.65,26.83
OUT3 on TOP: 20.25,33.51 20.25,28.92 22.29,28.92 22.29,33.51
REGIN on TOP: 24.15,11.9 24.15,9.42 24.62,8.95 24.62,1.85 24.82,1.65 26.12,1.65 26.3,1.82 26.32,9.72 25.6,10.45 24.85,10.45 24.52,10.77 24.52,11.9
REGIN on TOP: 24.7,11.9 25.37,11.9 25.47,11.8 25.47,10.47 24.9,10.47 24.7,10.67
SNA on TOP: 26,24.82 36.12,24.82 36.21,24.57 36.3,24.31 37.1,18.74 36.2,13.19 35.23,12.22 33.88,12.44 31.66,12.52 30.73,10.5 30.59,9.38 29.86,8.51 28.66,6.61 29.27,4.45 29.39,4.06 29.17,3.71 27.97,2.94 26.71,2.26 26.71,0.1 10.49,0.1 10.49,2.25 9.29,2.9 8.13,3.63 7.92,3.98 8.03,4.38 8.63,6.54 7.41,8.42 6.67,9.29 6.52,10.42 6.54,10.92 6.43,11.4 7.25,12.22 11.2,12.22 12.22,13.25 12.22,17.32 14.82,19.92 19.5,19.92 22.5,22.92 24.1,22.92 ; 1 cut-out
SNA on TOP: 8.65,13.42 5.07,13.35 5.05,28.72 7.57,28.72 7.57,23.65 8.65,22.57
SNA on TOP: 17.77,19.77 15.55,19.77 15.07,20.25 13.9,20.25 13.87,20.27 13.87,20.47 13.62,20.72 13.62,21.07 15.15,22.6 17.5,22.6 17.97,22.12 17.97,19.97
SNA on BOTTOM: 25.92,34.07 25.92,30.72 25.62,30.42 12.22,30.4 11.8,29.97 11.8,28.5 10.95,28.5 10.4,27.95 10.4,27.1 9.3,27.1 8.65,26.45 8.65,14.52 10.27,12.9 11.15,12.9 12.15,11.9 12.15,9.15 11.97,8.97 9.97,8.97 9.87,8.87 9.87,5.65 10.12,5.4 13.52,5.4 13.7,5.22 13.7,3.97 14.1,3.57 19.85,3.57 22.17,5.9 22.17,10.95 20.5,12.62 19.87,12.62 17.35,15.15 13.3,15.17 12.15,16.32 12.15,22.9 14.17,24.9 36.12,24.82 36.21,24.57 36.3,24.31 37.1,18.74 36.2,13.19 35.23,12.22 33.88,12.44 31.66,12.52 30.73,10.5 30.59,9.38 29.86,8.51 28.66,6.61 29.27,4.45 29.39,4.06 29.17,3.71 27.97,2.94 26.71,2.26 26.71,0.1 10.49,0.1 10.49,2.25 9.29,2.9 8.13,3.63 7.92,3.98 8.03,4.38 8.63,6.54 7.41,8.42 6.67,9.29 6.52,10.42 6.15,11.92 4.8,12.7 4.8,29.04 7.36,29.31 8.57,31.59 8.56,31.71 9.2,33.3 10.75,34.01 16.87,34.03 16.9,34.02 18.54,33.16 20.19,34.03 20.21,34.04
SNA on GND2: 26.33,34.07 27.93,33.33 28.54,31.67 30.12,29.19 33.04,29.57 33.37,29.69 33.69,29.58 35.2,27.05 36.3,24.31 37.1,18.74 36.2,13.19 35.23,12.22 33.88,12.44 31.66,12.52 30.73,10.5 30.59,9.38 29.86,8.51 28.66,6.61 29.27,4.45 29.39,4.06 29.17,3.71 27.97,2.94 26.71,2.26 26.71,0.1 10.49,0.1 10.49,2.25 9.29,2.9 8.13,3.63 7.92,3.98 8.03,4.38 8.63,6.54 7.41,8.42 6.67,9.29 6.52,10.42 6.4,11.47 5.75,12.32 5.75,23.3 4.9,24.15 4.9,29 7.41,29.34 8.57,31.59 8.56,31.71 9.2,33.3 10.75,34.01 16.87,34.03 16.9,34.02 18.54,33.16 20.19,34.03 20.21,34.04 ; 2 cut-outs
SPA on TOP: 14.23,28.25 14.22,29.95 12.1,29.95 12.1,28.25
SPA on BOTTOM: 14.6,28.25 14.6,29.75 12.1,29.75 12.1,28.25
SPB on TOP: 19.63,28.25 19.64,29.95 17.48,29.95 17.48,28.25
SPB on BOTTOM: 19.98,28.25 19.98,29.75 17.48,29.75 17.48,28.25
SPC on TOP: 25.41,28.25 25.43,29.95 22.9,29.95 22.9,28.25
SPC on BOTTOM: 25.41,28.25 25.41,29.75 22.91,29.75 22.91,28.25
SW on TOP: 24,11.9 24,9.52 23.42,8.95 23.42,6.25 22.7,5.52 20.95,5.52 20.4,4.97 20.1,4.97 19.95,5.12 19.95,6.2 20.15,6.4 21.1,6.4 21.82,7.12 21.82,9.02 23.62,10.82 23.62,11.9
VM on TOP: 23.12,11.92 23.5,11.92 23.5,11 21.57,9.07 21.57,7.22 21,6.65 18.87,6.65 18.7,6.82 18.7,8.62 19.02,8.95 19.85,8.95 20.2,9.3 20.2,10.15 21,10.95 22.92,10.95 23.12,11.15
VM on TOP: 8.97,22.62 8.97,13.3 10.77,13.3 10.77,22.62
VM on TOP: 8.37,26.52 8.37,23.67 23.05,23.7 23.05,26.52
VM on TOP: 3.68,29.58 4.07,29.47 4.42,29.22 4.8,29.04 4.8,12.7 4.05,12.65 3.37,12.32 2.1,12.07 1.1,12.9 0.23,21.07 2.99,28.82 3.15,29.09 3.33,29.36
VM on BOTTOM: 18.82,6.77 21.15,6.77 21.57,7.2 21.57,10.67 20.22,12 18.62,12 15.77,14.85 13.17,14.85 11.87,16.15 11.9,23.42 12.1,23.62 23.07,23.62 23.15,23.7 23.15,26.47 22.77,26.85 9.47,26.85 8.97,26.35 8.97,14.77 10.67,13.07 11.32,13.07 12.3,12.1 12.3,11.25 13.97,9.57 18.22,9.57 18.82,9
VM on POWER3: 0.13,19.94 1.88,26.82 23.5,26.82 23.5,24.05 22.92,23.47 13.35,23.47 12.65,22.77 12.65,16.9 14.27,15.27 14.27,11.87 17.1,9.05 21.05,9.05 21.05,0.1 10.49,0.1 10.49,2.25 9.29,2.9 8.13,3.63 7.92,3.98 8.03,4.38 8.63,6.54 7.41,8.42 6.67,9.29 6.52,10.42 5.58,12.43 3.37,12.32 2.1,12.07 1.1,12.9
N16851538 on BOTTOM: 16.62,3.87 16.62,5.6 15.35,6.87 15.35,7.45 14.8,8 13.45,8 12.65,8.8 10.1,8.8 10.1,5.8 13.9,5.8 14.07,5.62 14.07,3.87
N16851557 on BOTTOM: 19.57,3.85 19.57,5.75 18.12,7.2 18.12,9.15 18,9.27 15.82,9.27 15.67,9.12 15.67,6.85 16.92,5.6 16.92,3.85

## Text on the board
Ref Des/Silkscreen Bottom: H | L | GND | VCC | TX | RX
COMPVAL_TYPE_TOP: FIGURE | FINISHED_SIZE | 0.3 | 0.508 | DRILL CHART: TOP to BOTTOM | ALL UNITS ARE IN MILLIMETERS | PLATED | QTY | 385 | 4
